# Altium PCB XCKU5P.PcbDoc (part 2 of 4)
Units mil, origin at the board's own origin, x right, y up, seen from the top; angles counter-clockwise.
Board outline 2716.54 x 2559.06 mil, 5 copper layers (Top Layer, SIG1, SIG2, SIG3, Bottom Layer); 206 components, 306 nets, 1544 pads, 186 vias.
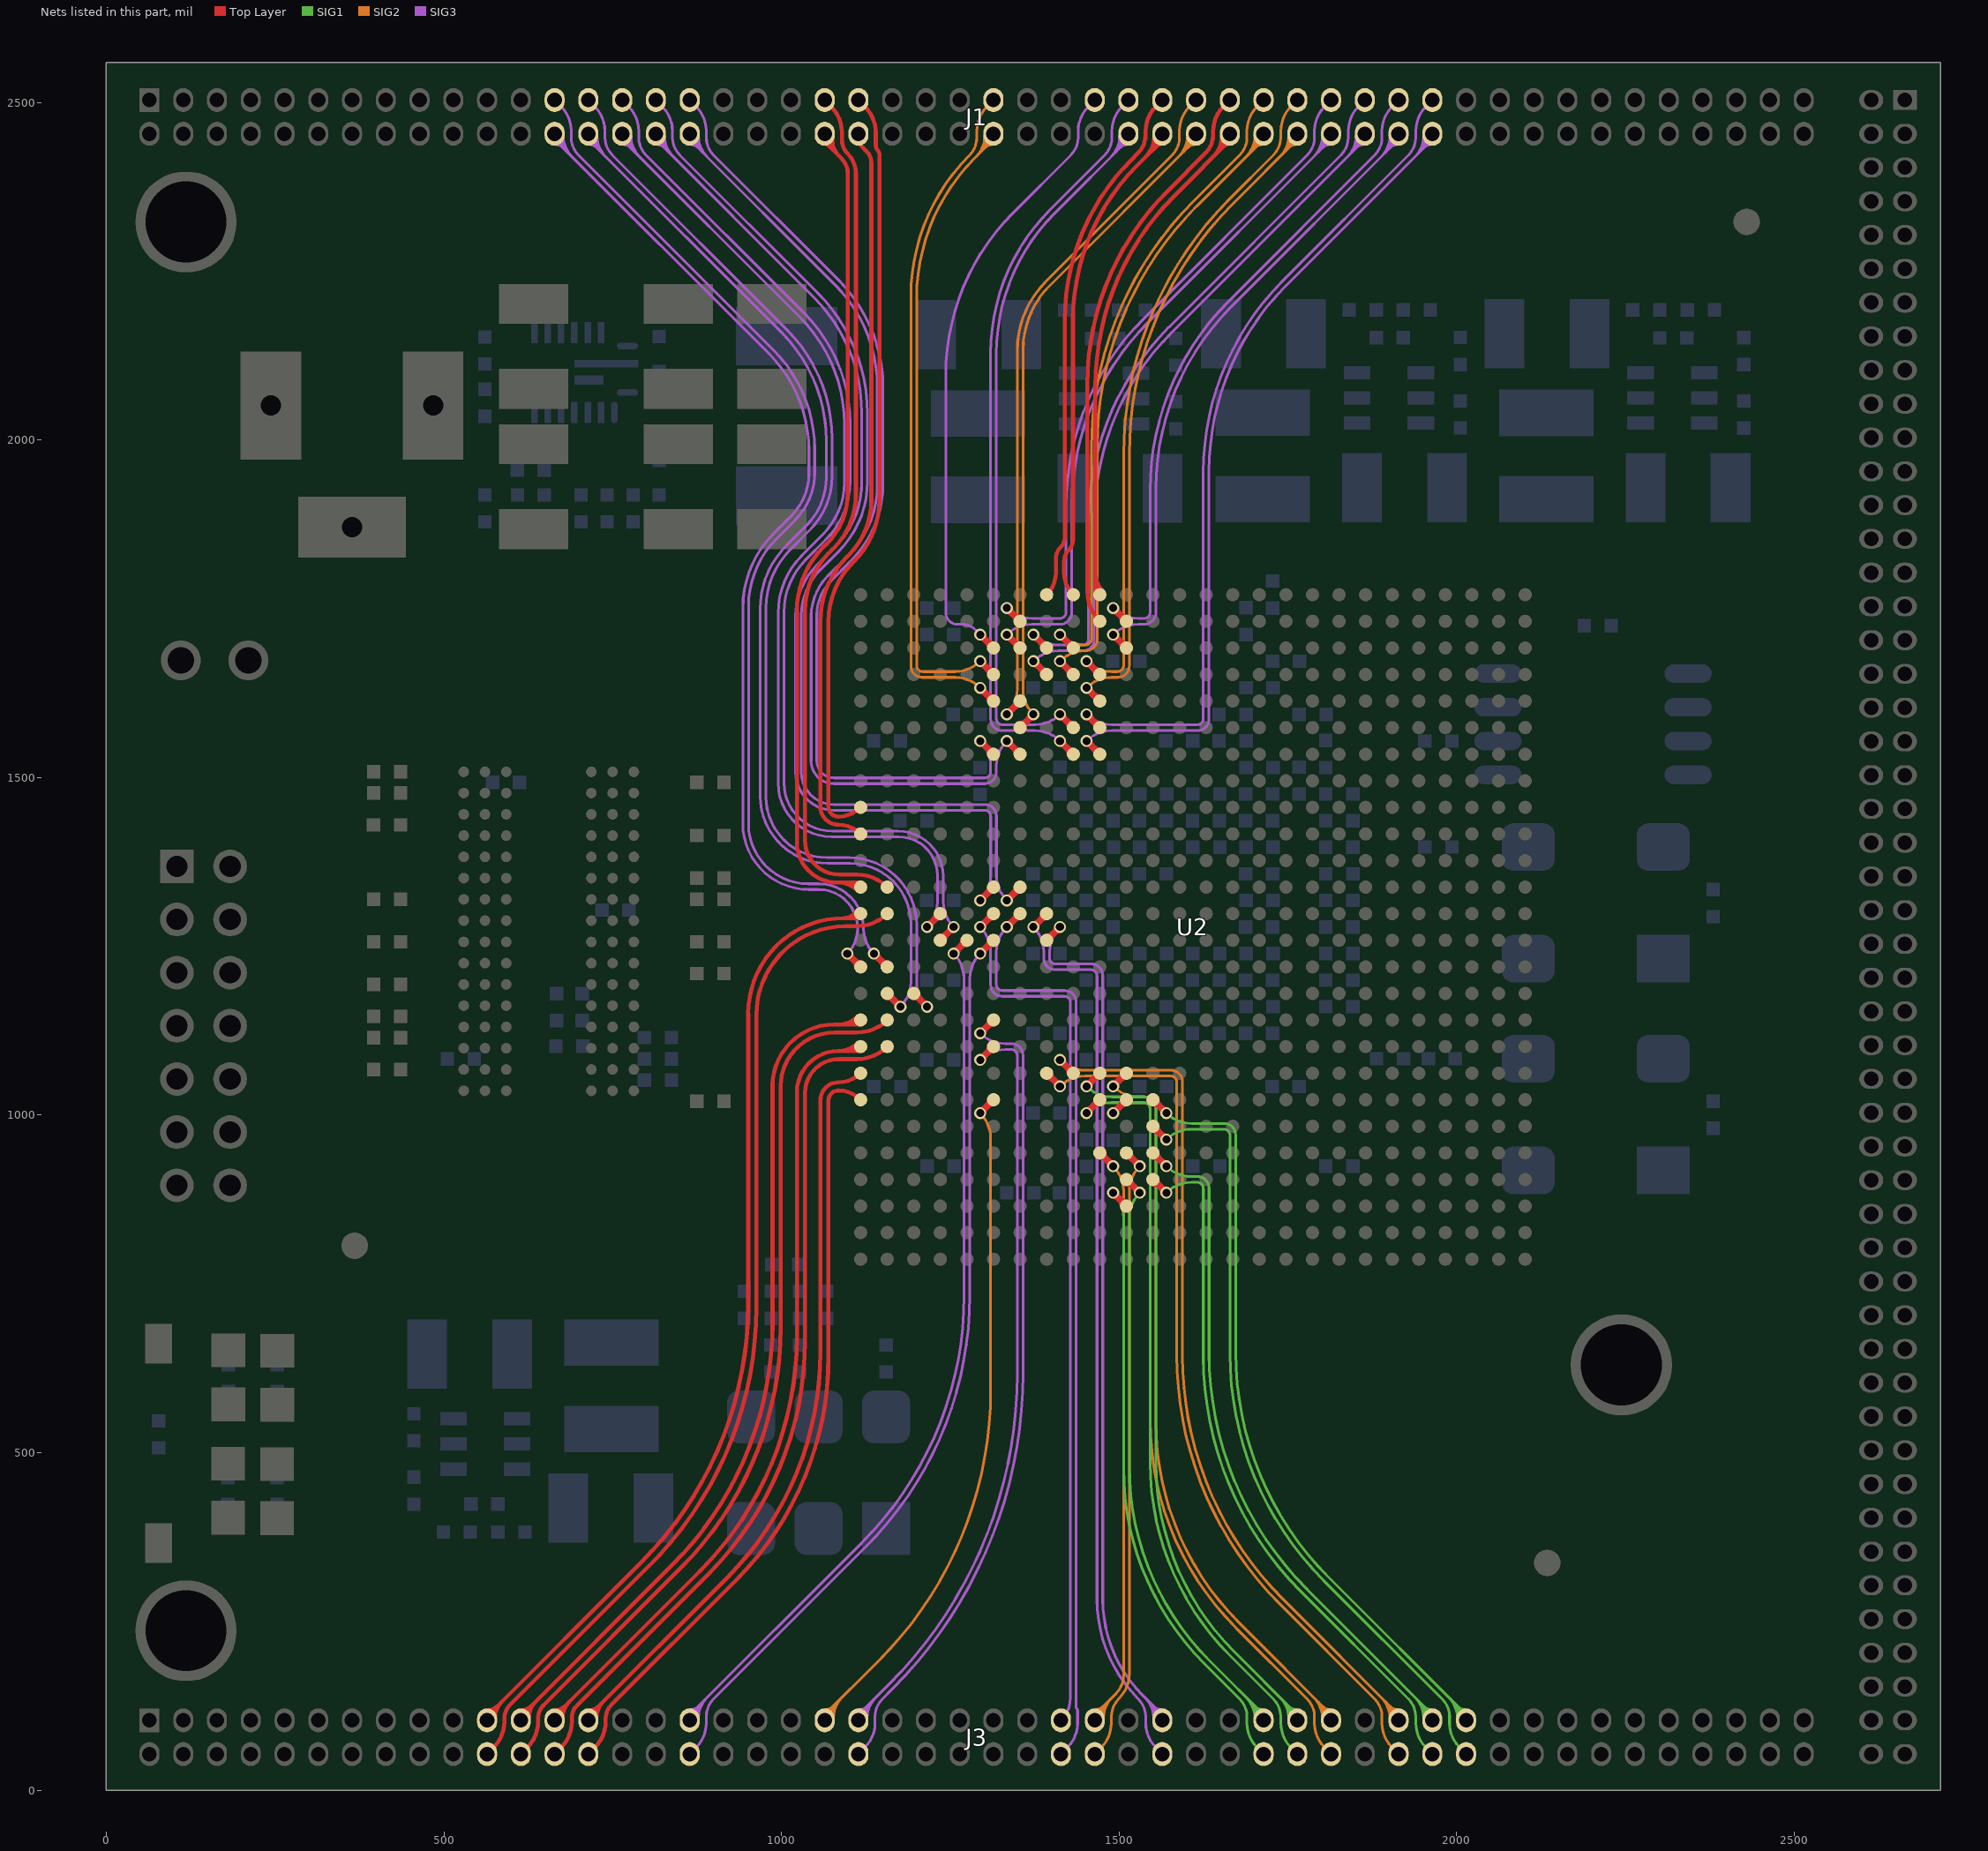
[diagram p5: the nets of this part, all layers, seen from the top]

## Via types
v1: diameter 17.72, hole 11.81, Top Layer to Bottom Layer, tented both sides, 186 vias

## Nets (pads, with @x,y where several pads share a name; then routed paths per layer and width w, separated by ;. In a path a pad name is that pad's centre, name@x,y a point inside that pad or via, vN(x,y) a via of type N, cw(c..) or ccw(c..) an arc to the next point about the centre after c; other vN are vias at no path point) (continued)
64_L11_P: J1.57 U2.AD21 | length 959.2
  Top Layer w10: v1@1294.39,1707.85 cw(c1294.39,1698.53) 1300.98,1705.12 cw(c1307.57,1711.71) v1@1298.25,1711.71 ; v1(1294.39,1711.71) U2.AD21@1314.08,1692.02 ; U2.AD21@1309.24,1692.02 ccw(c1297.55,1692.02) 1305.81,1700.29 ccw(c1314.08,1708.55) U2.AD21@1314.08,1696.86
  SIG3 w4: v1(1294.39,1711.71) 1287.5,1718.6 ccw(c1266.88,1697.98) 1266.88,1727.14 1260.16,1727.14 cw(c1260.16,1744.02) 1243.28,1744.02 1243.28,2096.05 cw(c1582.51,2096.05) 1342.64,2335.92 1428.43,2421.7 ccw(c1401.84,2448.29) 1439.44,2448.29 1439.44,2457.24 cw(c1491.77,2457.24) 1454.77,2494.25 J1.57@1464.02,2503.5
64_L12_N: J1.52 U2.AC21 | length 1072.4
  Top Layer w10: v1@1294.39,1668.48 cw(c1294.39,1659.16) 1300.98,1665.75 cw(c1307.57,1672.34) v1@1298.25,1672.34 ; v1(1294.39,1672.34) U2.AC21@1314.08,1652.65 ; U2.AC21@1309.24,1652.65 ccw(c1297.55,1652.65) 1305.81,1660.92 ccw(c1314.08,1669.18) U2.AC21@1314.08,1657.49
  SIG2 w4: 1288.77,2420.03 ccw(c1258.62,2450.17) J1.52@1301.26,2450.46 ; v1(1294.39,1672.34) cw(c1257.13,1709.6) 1257.13,1656.9 1209.22,1656.9 cw(c1209.22,1665.95) 1200.17,1665.95 1200.17,2209.86 cw(c1493.65,2209.86) 1286.13,2417.39 J1.52@1314.82,2446.08 ; 1295.53,2426.79 ccw(c1272.06,2450.26) J1.52@1305.26,2450.49 ; 1301.23,2432.49 cw(c1314.02,2419.7) J1.52@1314.02,2437.78 ; 1302.3,2433.55 ccw(c1285.49,2450.36) J1.52@1309.26,2450.52
64_L12_P: J1.51 U2.AB21 | length 1049.6
  Top Layer w10: v1@1294.39,1629.11 cw(c1294.39,1619.79) 1300.98,1626.38 cw(c1307.57,1632.97) v1@1298.25,1632.97 ; v1(1294.39,1632.97) U2.AB21@1314.08,1613.28 ; U2.AB21@1309.24,1613.28 ccw(c1297.55,1613.28) 1305.81,1621.55 ccw(c1314.08,1629.81) U2.AB21@1314.08,1618.12
  SIG2 w4: v1(1294.39,1632.97) ccw(c1257.13,1595.7) 1257.13,1648.4 1208.55,1648.4 cw(c1208.55,1665.28) 1191.67,1665.28 1191.67,2212.26 cw(c1487.86,2212.26) 1278.43,2421.7 ccw(c1251.84,2448.29) 1289.44,2448.29 1289.44,2457.24 cw(c1341.77,2457.24) 1304.77,2494.25 J1.51@1314.02,2503.5
64_L13_N: J1.71 U2.AE20 | length 1058.4
  Top Layer w10: v1@1333.76,1747.22 cw(c1333.76,1737.9) 1340.35,1744.49 cw(c1346.94,1751.08) v1@1337.62,1751.08 ; v1(1333.76,1751.08) U2.AE20@1353.45,1731.39 ; U2.AE20@1348.61,1731.39 ccw(c1336.92,1731.39) 1345.18,1739.66 ccw(c1353.45,1747.92) U2.AE20@1353.45,1736.23
  SIG3 w4: v1(1333.76,1751.08) ccw(c1371.03,1788.34) 1371.03,1735.64 1412.43,1735.64 ccw(c1412.43,1744.69) 1421.48,1744.69 1421.48,1901.24 cw(c1816.25,1901.24) 1537.11,2180.38 1778.43,2421.7 ccw(c1751.84,2448.29) 1789.44,2448.29 1789.44,2457.24 cw(c1841.77,2457.24) 1804.77,2494.25 J1.71@1814.02,2503.5
64_L13_P: J1.72 U2.AD20 | length 1108.6
  Top Layer w10: v1@1333.76,1707.85 cw(c1333.76,1698.53) 1340.35,1705.12 cw(c1346.94,1711.71) v1@1337.62,1711.71 ; v1(1333.76,1711.71) U2.AD20@1353.45,1692.02 ; U2.AD20@1348.61,1692.02 ccw(c1336.92,1692.02) 1345.18,1700.29 ccw(c1353.45,1708.55) U2.AD20@1353.45,1696.86
  SIG3 w4: v1(1333.76,1711.71) cw(c1371.03,1674.44) 1371.03,1727.14 1413.1,1727.14 ccw(c1413.1,1744.02) 1429.98,1744.02 1429.98,1902.04 cw(c1814.32,1902.04) 1542.55,2173.81 J1.72@1814.02,2445.28 ; 1788.5,2419.76 ccw(c1757.72,2450.55) J1.72@1801.26,2450.55 ; 1795.33,2426.59 ccw(c1771.37,2450.55) J1.72@1805.26,2450.55 ; 1801.23,2432.49 cw(c1814.02,2419.7) J1.72@1814.02,2437.78 ; 1802.16,2433.42 ccw(c1785.03,2450.55) J1.72@1809.26,2450.55
64_L14_N: J1.73 U2.AD19 | length 1098.1
  Top Layer w10: v1@1373.13,1707.85 cw(c1373.13,1698.53) 1379.72,1705.12 cw(c1386.31,1711.71) v1@1376.99,1711.71 ; v1(1373.13,1711.71) U2.AD19@1392.82,1692.02 ; U2.AD19@1387.98,1692.02 ccw(c1376.29,1692.02) 1384.55,1700.29 ccw(c1392.82,1708.55) U2.AD19@1392.82,1696.86
  SIG3 w4: v1(1373.13,1711.71) ccw(c1410.4,1748.97) 1410.4,1696.27 1445.83,1696.27 ; 1445.83,1696.27 ccw(c1445.83,1705.32) 1454.88,1705.32 1454.88,1879.55 cw(c1861.94,1879.55) 1574.11,2167.38 1828.43,2421.7 ccw(c1801.84,2448.29) 1839.44,2448.29 1839.44,2457.24 cw(c1891.77,2457.24) 1854.77,2494.25 J1.73@1864.02,2503.5
64_L14_P: J1.74 U2.AC19 | length 1148.5
  Top Layer w10: v1@1373.13,1668.48 cw(c1373.13,1659.16) 1379.72,1665.75 cw(c1386.31,1672.34) v1@1376.99,1672.34 ; v1(1373.13,1672.34) U2.AC19@1392.82,1652.65 ; U2.AC19@1387.98,1652.65 ccw(c1376.29,1652.65) 1384.55,1660.92 ccw(c1392.82,1669.18) U2.AC19@1392.82,1657.49
  SIG3 w4: v1(1373.13,1672.34) cw(c1410.4,1635.07) 1410.4,1687.77 1446.5,1687.77 ccw(c1446.5,1704.65) 1463.38,1704.65 1463.38,1881.33 cw(c1857.65,1881.33) 1578.86,2160.12 J1.74@1864.02,2445.28 ; 1838.5,2419.76 ccw(c1807.72,2450.55) J1.74@1851.26,2450.55 ; 1845.33,2426.59 ccw(c1821.37,2450.55) J1.74@1855.26,2450.55 ; 1851.23,2432.49 cw(c1864.02,2419.7) J1.74@1864.02,2437.78 ; 1852.16,2433.42 ccw(c1835.03,2450.55) J1.74@1859.26,2450.55
64_L15_N: J1.61 U2.AF19 | length 781.4
  Top Layer w6: U2.AF19@1392.82,1770.76 ccw(c1359.78,1803.8) 1406.5,1803.8 1406.5,1824.76 cw(c1429.08,1824.76) 1413.12,1840.73 ccw(c1397.15,1856.69) 1419.73,1856.69 1419.73,2177.46 cw(c1755.64,2177.46) 1518.12,2414.99 1528.33,2425.2 ccw(c1501.74,2451.79) 1539.34,2451.79 1539.34,2457 cw(c1592.01,2457) 1554.77,2494.25 J1.61@1564.02,2503.5
64_L15_P: J1.62 U2.AF18 | length 795.5
  Top Layer w6: U2.AF18@1432.19,1770.76 cw(c1465.23,1803.8) 1418.5,1803.8 1418.5,1820.26 cw(c1441.08,1820.26) 1425.12,1836.23 ccw(c1409.15,1852.19) 1431.73,1852.19 1431.73,2177.43 cw(c1755.89,2177.43) 1526.67,2406.65 J1.62@1568.41,2448.39 ; 1539.3,2419.28 ccw(c1508.03,2450.55) J1.62@1552.26,2450.55 ; 1549.55,2429.52 ccw(c1528.52,2450.55) J1.62@1558.26,2450.55 ; 1555.12,2435.1 cw(c1564.02,2426.2) J1.62@1564.02,2438.78
64_L16_N: J1.67 U2.AD18 | length 994
  Top Layer w10: v1@1412.5,1707.85 cw(c1412.5,1698.53) 1419.09,1705.12 cw(c1425.68,1711.71) v1@1416.36,1711.71 ; v1(1412.5,1711.71) U2.AD18@1432.19,1692.02 ; U2.AD18@1427.35,1692.02 ccw(c1415.66,1692.02) 1423.92,1700.29 ccw(c1432.19,1708.55) U2.AD18@1432.19,1696.86
  SIG2 w4: v1(1412.5,1711.71) ccw(c1449.77,1748.97) 1449.77,1696.27 ; 1450.13,1696.27 ccw(c1450.13,1705.32) 1459.18,1705.32 1459.18,1987.98 cw(c1976.99,1987.98) 1610.85,2354.12 1678.43,2421.7 ccw(c1651.84,2448.29) 1689.44,2448.29 1689.44,2457.24 cw(c1741.77,2457.24) 1704.77,2494.25 J1.67@1714.02,2503.5
64_L16_P: J1.68 U2.AC18 | length 1045.9
  Top Layer w10: v1@1412.5,1668.48 cw(c1412.5,1659.16) 1419.09,1665.75 cw(c1425.68,1672.34) v1@1416.36,1672.34 ; v1(1412.5,1672.34) U2.AC18@1432.19,1652.65 ; U2.AC18@1427.35,1652.65 ccw(c1415.66,1652.65) 1423.92,1660.92 ccw(c1432.19,1669.18) U2.AC18@1432.19,1657.49
  SIG2 w4: v1(1412.5,1672.34) cw(c1449.77,1635.07) 1449.77,1687.77 1450.8,1687.77 ccw(c1450.8,1704.65) 1467.68,1704.65 1467.68,1990.37 cw(c1971.2,1990.37) 1615.16,2346.42 J1.68@1714.82,2446.08 ; 1688.5,2419.76 ccw(c1657.72,2450.55) J1.68@1701.26,2450.55 ; 1695.33,2426.59 ccw(c1671.37,2450.55) J1.68@1705.26,2450.55 ; 1701.23,2432.49 cw(c1714.02,2419.7) J1.68@1714.02,2437.78 ; 1702.16,2433.42 ccw(c1685.03,2450.55) J1.68@1709.26,2450.55
64_L17_N: J1.66 U2.AF17 | length 864.6
  Top Layer w6: U2.AF17@1464.95,1769.37 1464.95,2079.2 cw(c1865.05,2079.2) 1582.13,2362.11 J1.66@1668.77,2448.75 ; 1464.95,1788.75 ccw(c1489.55,1788.75) U2.AF17@1472.15,1771.36 ; 1464.95,1803.24 ccw(c1504.04,1803.24) U2.AF17@1476.4,1775.6 ; 1639.3,2419.28 ccw(c1608.03,2450.55) J1.66@1652.26,2450.55 ; 1649.55,2429.52 ccw(c1628.52,2450.55) J1.66@1658.26,2450.55 ; 1655.12,2435.1 cw(c1664.02,2426.2) J1.66@1664.02,2438.78
64_L17_P: J1.65 U2.AE17 | length 843.2
  Top Layer w6: U2.AE17@1471.56,1731.39 cw(c1516.49,1776.32) 1452.95,1776.32 1452.95,2081.85 cw(c1858.47,2081.85) 1571.72,2368.6 1628.33,2425.2 ccw(c1601.74,2451.79) 1639.34,2451.79 1639.34,2457 cw(c1692.01,2457) 1654.77,2494.25 J1.65@1664.02,2503.5
64_L18_N: J1.75 U2.AE16 | length 1015.3
  Top Layer w10: v1@1491.24,1747.22 cw(c1491.24,1737.9) 1497.83,1744.49 cw(c1504.42,1751.08) v1@1495.1,1751.08 ; v1(1491.24,1751.08) U2.AE16@1510.93,1731.39 ; U2.AE16@1506.09,1731.39 ccw(c1494.4,1731.39) 1502.66,1739.66 ccw(c1510.93,1747.92) U2.AE16@1510.93,1736.23
  SIG3 w4: v1(1491.24,1751.08) ccw(c1528.51,1788.34) 1528.51,1735.64 1537,1735.64 ccw(c1537,1744.69) 1546.05,1744.69 1546.05,1925.5 cw(c1941.56,1925.5) 1661.89,2205.17 1878.43,2421.7 ccw(c1851.84,2448.29) 1889.44,2448.29 1889.44,2457.24 cw(c1941.77,2457.24) 1904.77,2494.25 J1.75@1914.02,2503.5
64_L18_P: J1.76 U2.AD16 | length 1065.7
  Top Layer w10: v1@1491.24,1707.85 cw(c1491.24,1698.53) 1497.83,1705.12 cw(c1504.42,1711.71) v1@1495.1,1711.71 ; v1(1491.24,1711.71) U2.AD16@1510.93,1692.02 ; U2.AD16@1506.09,1692.02 ccw(c1494.4,1692.02) 1502.66,1700.29 ccw(c1510.93,1708.55) U2.AD16@1510.93,1696.86
  SIG3 w4: v1(1491.24,1711.71) cw(c1528.51,1674.44) 1528.51,1727.14 1537.67,1727.14 ccw(c1537.67,1744.02) 1554.55,1744.02 1554.55,1927.97 cw(c1935.59,1927.97) 1666.15,2197.41 J1.76@1914.02,2445.28 ; 1888.5,2419.76 ccw(c1857.72,2450.55) J1.76@1901.26,2450.55 ; 1895.33,2426.59 ccw(c1871.37,2450.55) J1.76@1905.26,2450.55 ; 1901.23,2432.49 cw(c1914.02,2419.7) J1.76@1914.02,2437.78 ; 1902.16,2433.42 ccw(c1885.03,2450.55) J1.76@1909.26,2450.55
64_L19_N: J1.33 U2.Y21 | length 1502
  Top Layer w10: v1@1294.39,1550.37 cw(c1294.39,1541.05) 1300.98,1547.64 cw(c1307.57,1554.23) v1@1298.25,1554.23 ; v1(1294.39,1554.23) U2.Y21@1314.08,1534.54 ; U2.Y21@1309.24,1534.54 ccw(c1297.55,1534.54) 1305.81,1542.81 ccw(c1314.08,1551.07) U2.Y21@1314.08,1539.38
  SIG3 w4: J1.33@864.02,2503.5 873.27,2494.25 cw(c836.27,2457.24) 888.6,2457.24 888.6,2448.29 ccw(c926.2,2448.29) 899.61,2421.7 1084.34,2236.98 cw(c924.82,2077.46) 1150.41,2077.46 1150.41,1935.57 cw(c987.91,1935.57) 1102.82,1820.67 1073.31,1791.17 ccw(c1123.78,1740.7) 1052.41,1740.7 1052.41,1525.05 ccw(c1078.08,1525.05) 1078.08,1499.37 1300.78,1499.37 ccw(c1300.78,1508.43) 1309.83,1508.43 1309.83,1516.96 ccw(c1257.13,1516.96) v1(1294.39,1554.23)
64_L19_P: J1.34 U2.Y20 | length 1566
  Top Layer w10: v1@1333.76,1550.37 cw(c1333.76,1541.05) 1340.35,1547.64 cw(c1346.94,1554.23) v1@1337.62,1554.23 ; v1(1333.76,1554.23) U2.Y20@1353.45,1534.54 ; U2.Y20@1348.61,1534.54 ccw(c1336.92,1534.54) 1345.18,1542.81 ccw(c1353.45,1551.07) U2.Y20@1353.45,1539.38
  SIG3 w4: J1.34@864.02,2437.78 cw(c864.02,2419.7) 876.81,2432.49 ; J1.34@864.02,2445.28 1079.41,2229.88 cw(c928.53,2079) 1141.91,2079 1141.91,1933.11 cw(c993.85,1933.11) 1098.55,1828.42 1068.96,1798.83 ccw(c1129.44,1738.36) 1043.91,1738.36 1043.91,1524.5 ccw(c1077.54,1524.5) 1077.54,1490.88 1301.45,1490.88 ccw(c1301.45,1507.76) 1318.33,1507.76 1318.33,1516.96 cw(c1371.03,1516.96) v1(1333.76,1554.23) ; J1.34@868.78,2450.55 ccw(c893.01,2450.55) 875.88,2433.42 ; J1.34@872.78,2450.55 ccw(c906.67,2450.55) 882.71,2426.59 ; J1.34@876.78,2450.55 ccw(c920.32,2450.55) 889.54,2419.76
64_L21_N: J1.63 U2.AB20 | length 1074.4
  Top Layer w10: v1(1333.76,1593.59) U2.AB20@1353.45,1613.28 ; v1@1333.76,1597.45 ccw(c1333.76,1606.77) 1340.35,1600.18 ccw(c1346.94,1593.59) v1@1337.62,1593.59 ; U2.AB20@1348.61,1613.28 cw(c1336.92,1613.28) 1345.18,1605.01 cw(c1353.45,1596.75) U2.AB20@1353.45,1608.44
  SIG2 w4: v1(1333.76,1593.59) ccw(c1296.5,1630.86) 1349.2,1630.86 1349.2,2131.78 cw(c1495.73,2131.78) 1392.12,2235.39 1578.43,2421.7 ccw(c1551.84,2448.29) 1589.44,2448.29 1589.44,2457.24 cw(c1641.77,2457.24) 1604.77,2494.25 J1.63@1614.02,2503.5
64_L21_P: J1.64 U2.AA20 | length 1112.2
  Top Layer w10: U2.AA20@1353.45,1573.91 v1(1373.13,1593.6) ; U2.AA20@1353.45,1578.75 ccw(c1353.45,1590.44) 1361.72,1582.18 ccw(c1369.98,1573.91) U2.AA20@1358.29,1573.91 ; v1@1369.28,1593.6 cw(c1359.96,1593.6) 1366.55,1587.01 cw(c1373.13,1580.42) v1@1373.13,1589.74
  SIG2 w4: v1@1373.13,1593.59 cw(c1410.4,1630.86) 1357.7,1630.86 1357.7,2133.3 cw(c1492.07,2133.3) 1397.05,2228.31 J1.64@1614.82,2446.08 ; 1588.5,2419.76 ccw(c1557.72,2450.55) J1.64@1601.26,2450.55 ; 1595.33,2426.59 ccw(c1571.37,2450.55) J1.64@1605.26,2450.55 ; 1601.23,2432.49 cw(c1614.02,2419.7) J1.64@1614.02,2437.78 ; 1602.16,2433.42 ccw(c1585.03,2450.55) J1.64@1609.26,2450.55
64_L22_N: J1.69 U2.AC17 | length 1042.2
  Top Layer w10: v1@1451.87,1668.48 cw(c1451.87,1659.16) 1458.46,1665.75 cw(c1465.05,1672.34) v1@1455.73,1672.34 ; v1(1451.87,1672.34) U2.AC17@1471.56,1652.65 ; U2.AC17@1466.72,1652.65 ccw(c1455.03,1652.65) 1463.29,1660.92 ccw(c1471.56,1669.18) U2.AC17@1471.56,1657.49
  SIG2 w4: v1(1451.87,1672.34) ccw(c1489.14,1709.6) 1489.14,1656.9 1497.67,1656.9 ccw(c1497.67,1665.95) 1506.72,1665.95 1506.72,1978.39 cw(c2041.73,1978.39) 1663.42,2356.7 1728.43,2421.7 ccw(c1701.84,2448.29) 1739.44,2448.29 1739.44,2457.24 cw(c1791.77,2457.24) 1754.77,2494.25 J1.69@1764.02,2503.5
64_L22_P: J1.70 U2.AB17 | length 1093.6
  Top Layer w10: v1@1451.87,1629.11 cw(c1451.87,1619.79) 1458.46,1626.38 cw(c1465.05,1632.97) v1@1455.73,1632.97 ; v1(1451.87,1632.97) U2.AB17@1471.56,1613.28 ; U2.AB17@1466.72,1613.28 ccw(c1455.03,1613.28) 1463.29,1621.55 ccw(c1471.56,1629.81) U2.AB17@1471.56,1618.12
  SIG2 w4: v1(1451.87,1632.97) cw(c1489.14,1595.7) 1489.14,1648.4 1498.34,1648.4 ccw(c1498.34,1665.28) 1515.22,1665.28 1515.22,1979.45 cw(c2039.18,1979.45) 1668.69,2349.94 J1.70@1764.82,2446.08 ; 1738.5,2419.76 ccw(c1707.72,2450.55) J1.70@1751.26,2450.55 ; 1745.33,2426.59 ccw(c1721.37,2450.55) J1.70@1755.26,2450.55 ; 1751.23,2432.49 cw(c1764.02,2419.7) J1.70@1764.02,2437.78 ; 1752.16,2433.42 ccw(c1735.03,2450.55) J1.70@1759.26,2450.55
64_L23_N: J1.77 U2.AA17 | length 1278.7
  Top Layer w10: v1@1451.87,1589.74 cw(c1451.87,1580.42) 1458.46,1587.01 cw(c1465.05,1593.6) v1@1455.73,1593.6 ; v1(1451.87,1593.6) U2.AA17@1471.56,1573.91 ; U2.AA17@1466.72,1573.91 ccw(c1455.03,1573.91) 1463.29,1582.18 ccw(c1471.56,1590.44) U2.AA17@1471.56,1578.75
  SIG3 w4: v1(1451.87,1593.6) ccw(c1489.14,1630.86) 1489.14,1578.16 1615.74,1578.16 ; 1615.74,1578.12 ccw(c1615.74,1587.17) 1624.79,1587.17 1624.79,1951.62 cw(c2026.61,1951.62) 1742.48,2235.75 1928.43,2421.7 ccw(c1901.84,2448.29) 1939.44,2448.29 1939.44,2457.24 cw(c1991.77,2457.24) 1954.77,2494.25 J1.77@1964.02,2503.5
64_L23_P: J1.78 U2.Y17 | length 1329.1
  Top Layer w10: v1@1451.87,1550.37 cw(c1451.87,1541.05) 1458.46,1547.64 cw(c1465.05,1554.23) v1@1455.73,1554.23 ; v1(1451.87,1554.23) U2.Y17@1471.56,1534.54 ; U2.Y17@1466.72,1534.54 ccw(c1455.03,1534.54) 1463.29,1542.81 ccw(c1471.56,1551.07) U2.Y17@1471.56,1539.38
  SIG3 w4: v1(1451.87,1554.23) cw(c1489.14,1516.96) 1489.14,1569.66 1616.41,1569.66 ; 1616.41,1569.62 ccw(c1616.41,1586.5) 1633.29,1586.5 1633.29,1953.69 cw(c2021.62,1953.69) 1747.03,2228.29 J1.78@1964.02,2445.28 ; 1938.5,2419.76 ccw(c1907.72,2450.55) J1.78@1951.26,2450.55 ; 1945.33,2426.59 ccw(c1921.37,2450.55) J1.78@1955.26,2450.55 ; 1951.23,2432.49 cw(c1964.02,2419.7) J1.78@1964.02,2437.78 ; 1952.16,2433.42 ccw(c1935.03,2450.55) J1.78@1959.26,2450.55
64_L24_N: J1.60 U2.AA18 | length 1184.9
  Top Layer w10: v1@1412.5,1589.74 cw(c1412.5,1580.42) 1419.09,1587.01 cw(c1425.68,1593.6) v1@1416.36,1593.6 ; v1(1412.5,1593.6) U2.AA18@1432.19,1573.91 ; U2.AA18@1427.35,1573.91 ccw(c1415.66,1573.91) 1423.92,1582.18 ccw(c1432.19,1590.44) U2.AA18@1432.19,1578.75
  SIG3 w4: v1(1412.5,1593.6) cw(c1375.24,1630.86) 1375.24,1578.16 1327.33,1578.16 cw(c1327.33,1587.21) 1318.28,1587.21 1318.28,2127.65 cw(c1612.55,2127.65) 1404.47,2335.73 J1.60@1514.02,2445.28 ; 1488.5,2419.76 ccw(c1457.72,2450.55) J1.60@1501.26,2450.55 ; 1495.33,2426.59 ccw(c1471.37,2450.55) J1.60@1505.26,2450.55 ; 1501.23,2432.49 cw(c1514.02,2419.7) J1.60@1514.02,2437.78 ; 1502.16,2433.42 ccw(c1485.03,2450.55) J1.60@1509.26,2450.55
64_L24_P: J1.59 U2.Y18 | length 1162
  Top Layer w10: v1@1412.5,1550.37 cw(c1412.5,1541.05) 1419.09,1547.64 cw(c1425.68,1554.23) v1@1416.36,1554.23 ; v1(1412.5,1554.23) U2.Y18@1432.19,1534.54 ; U2.Y18@1427.35,1534.54 ccw(c1415.66,1534.54) 1423.92,1542.81 ccw(c1432.19,1551.07) U2.Y18@1432.19,1539.38
  SIG3 w4: v1(1412.5,1554.23) ccw(c1375.24,1516.96) 1375.24,1569.66 1326.66,1569.66 cw(c1326.66,1586.54) 1309.78,1586.54 1309.78,2128.32 cw(c1610.92,2128.32) 1397.99,2341.26 1478.43,2421.7 ccw(c1451.84,2448.29) 1489.44,2448.29 1489.44,2457.24 cw(c1541.77,2457.24) 1504.77,2494.25 J1.59@1514.02,2503.5
65_L16_N: J1.43 U2.V26 | length 1136.4
  Top Layer w6: J1.43@1114.02,2503.5 1123.27,2494.25 cw(c1083.61,2454.59) 1139.7,2454.59 1139.7,2435.85 ccw(c1149.07,2435.85) 1142.45,2429.23 cw(c1135.83,2422.61) 1145.19,2422.61 1145.19,2418.4 1145.19,1911.39 cw(c1016.26,1911.39) 1107.43,1820.22 1106.03,1818.82 ccw(c1193.78,1731.07) 1069.68,1731.07 1069.68,1456.62 ccw(c1084.19,1456.62) 1084.19,1442.11 ccw(c1084.19,1488.84) U2.V26@1117.23,1455.8
65_L16_P: J1.44 U2.U26 | length 1098.1
  Top Layer w6: 1097.01,1826.77 ccw(c1192.17,1731.74) 1057.68,1731.74 1057.68,1456.62 ccw(c1084.19,1456.62) 1084.19,1430.11 cw(c1084.19,1383.39) U2.U26@1117.23,1416.43 ; 1097.07,1826.84 1098.74,1828.5 ccw(c1015.56,1911.67) 1133.19,1911.67 1133.19,2410.17 ccw(c1107.99,2410.17) 1125.81,2427.99 1121.89,2431.9 ; J1.44@1108.2,2445.6 1122.72,2431.08
65_L17_N: J3.21 U2.P26 | length 1526.2
  Top Layer w6: J3.21@564.02,109.28 792.34,337.6 ccw(c409.84,720.1) 950.78,720.1 950.78,1150.48 cw(c1092,1150.48) 1092,1291.71 ; J3.21@564.02,118.22 ccw(c564.02,139.8) 579.28,124.54 ; J3.21@569.78,106.45 cw(c590.52,106.45) 575.86,121.11 ; J3.21@575.78,106.45 cw(c611,106.45) 586.1,131.36 ; 1103.25,1291.71 ccw(c1103.25,1307.69) U2.P26@1116.53,1298.79 ; U2.P26@1111.55,1302.13 cw(c1092.01,1315.23) 1092.01,1291.71 ; U2.P26@1118.62,1291.71 1092,1291.71
65_L17_P: J3.22 U2.P25 | length 1506.8
  Top Layer w6: J3.22@564.02,53.5 573.27,62.75 ccw(c533.61,102.41) 589.7,102.41 589.7,106.45 cw(c617.55,106.45) 597.85,126.13 804.48,332.77 ccw(c422.32,714.93) 962.78,714.93 962.78,1148.03 cw(c1094.46,1148.03) 1094.46,1279.71 1111.67,1279.71 ccw(c1111.67,1343.25) U2.P25@1156.6,1298.32
65_L18_N: J1.42 U2.R26 | length 1316.6
  Top Layer w6: J1.42@1058.5,2447.5 1088.68,2417.32 ; J1.42@1064.02,2438.78 cw(c1064.02,2431.07) 1069.48,2436.52 ; J1.42@1069.71,2449.63 ccw(c1092.2,2446.01) 1076.09,2429.91 ; J1.42@1075.63,2448.68 ccw(c1106.5,2443.71) 1084.4,2421.6 ; 1084.75,1344.3 cw(c1084.75,1305.21) U2.R26@1112.39,1332.85 ; 1088.7,2417.3 cw(c1065.5,2394.14) 1098.28,2394.14 1098.28,1921.05 cw(c992.94,1921.05) 1067.43,1846.56 1061.82,1840.95 ccw(c1156.07,1746.69) 1022.78,1746.69 1022.78,1404.15 ccw(c1082.63,1404.15) 1082.63,1344.3 U2.R26@1118.62,1344.3 ; 1099.23,1344.3 cw(c1099.23,1319.69) U2.R26@1116.63,1337.09
65_L18_P: J1.41 U2.R25 | length 1287.1
  Top Layer w6: J1.41@1064.02,2503.5 1073.27,2494.25 cw(c1033.61,2454.59) 1089.7,2454.59 1089.7,2444.07 ccw(c1117.88,2444.07) 1097.95,2424.15 cw(c1068.19,2394.38) 1110.28,2394.38 1110.28,1919.76 cw(c996.06,1919.76) 1076.84,1839 ; 1076.83,1838.99 1070.35,1832.51 ccw(c1156.25,1746.62) 1034.78,1746.62 1034.78,1406.9 ccw(c1085.37,1406.9) 1085.37,1356.3 1111.67,1356.3 cw(c1111.67,1292.76) U2.R25@1156.6,1337.69
65_L20_N: J3.55 U2.P21 | length 1350.9
  Top Layer w10: v1(1294.39,1278.63) U2.P21@1314.08,1298.32 ; v1@1294.39,1282.49 ccw(c1294.39,1291.81) 1300.98,1285.22 ; v1@1298.25,1278.63 cw(c1307.56,1278.63) 1300.98,1285.22 ; U2.P21@1309.24,1298.32 cw(c1297.55,1298.32) 1305.81,1290.05 cw(c1314.08,1281.79) U2.P21@1314.08,1293.48
  SIG3 w4: v1(1294.39,1278.63) cw(c1257.13,1241.37) 1309.83,1241.37 1309.83,1192.84 ccw(c1326.71,1192.84) 1326.71,1175.96 1418.93,1175.96 cw(c1418.93,1166.91) 1427.98,1166.91 1427.98,137 cw(c1380.82,137) 1414.17,103.65 J3.55@1414.02,103.5
65_L20_P: J3.56 U2.P20 | length 1405.6
  Top Layer w10: v1(1333.76,1278.63) U2.P20@1353.45,1298.32 ; v1@1333.76,1282.49 ccw(c1333.76,1291.81) 1340.35,1285.22 ; v1@1337.62,1278.63 cw(c1346.93,1278.63) 1340.35,1285.22 ; U2.P20@1348.61,1298.32 cw(c1336.92,1298.32) 1345.18,1290.05 cw(c1353.45,1281.79) U2.P20@1353.45,1293.48
  SIG3 w4: v1(1333.76,1278.63) ccw(c1371.03,1241.37) 1318.33,1241.37 1318.33,1193.51 ccw(c1327.38,1193.51) 1327.38,1184.46 1419.6,1184.46 cw(c1419.6,1167.58) 1436.48,1167.58 1436.48,123 ccw(c1440.1,123) 1437.54,120.44 cw(c1434.98,117.89) 1438.6,117.89 1438.6,99.76 cw(c1386.27,99.76) 1423.27,62.75 J3.56@1414.02,53.5
65_L21_N: J1.32 U2.R21 | length 1699.1
  Top Layer w10: v1(1294.39,1318) U2.R21@1314.08,1337.69 ; v1@1294.39,1321.86 ccw(c1294.39,1331.18) 1300.98,1324.59 ccw(c1307.56,1318) v1@1298.25,1318 ; U2.R21@1309.24,1337.69 cw(c1297.55,1337.69) 1305.81,1329.42 cw(c1314.08,1321.16) U2.R21@1314.08,1332.85
  SIG3 w4: J1.32@809.91,2449.39 1048.17,2211.13 cw(c877.39,2040.34) 1118.91,2040.34 1118.91,1936.51 cw(c985.64,1936.51) 1079.88,1842.28 1052.93,1815.33 ccw(c1130.23,1738.03) 1020.91,1738.03 1020.91,1507.86 ccw(c1077.23,1507.86) 1077.23,1451.55 1300.82,1451.55 cw(c1300.82,1442.5) 1309.87,1442.5 1309.87,1355.27 cw(c1257.17,1355.27) v1(1294.39,1318) ; J1.32@814.02,2437.78 cw(c814.02,2419.7) 826.81,2432.49 ; J1.32@818.78,2450.55 ccw(c843.01,2450.55) 825.88,2433.42 ; J1.32@822.78,2450.55 ccw(c856.67,2450.55) 832.71,2426.59 ; J1.32@826.78,2450.55 ccw(c870.32,2450.55) 839.54,2419.76
65_L21_P: J1.31 U2.R20 | length 1656.8
  Top Layer w10: v1(1333.76,1318) U2.R20@1353.45,1337.69 ; v1@1333.76,1321.86 ccw(c1333.76,1331.18) 1340.35,1324.59 ccw(c1346.93,1318) v1@1337.62,1318 ; U2.R20@1348.61,1337.69 cw(c1336.92,1337.69) 1345.18,1329.42 cw(c1353.45,1321.16) U2.R20@1353.45,1332.85
  SIG3 w4: J1.31@814.02,2503.5 823.27,2494.25 cw(c786.27,2457.24) 838.6,2457.24 838.6,2448.29 ccw(c876.2,2448.29) 849.61,2421.7 1053.32,2217.99 cw(c874.45,2039.13) 1127.41,2039.13 1127.41,1938.76 cw(c980.23,1938.76) 1084.3,1834.68 1057.52,1807.9 ccw(c1125.37,1740.04) 1029.41,1740.04 1029.41,1507.94 ccw(c1077.3,1507.94) 1077.3,1460.05 1301.49,1460.05 cw(c1301.49,1443.17) 1318.37,1443.17 1318.37,1355.27 ccw(c1371.07,1355.27) v1(1333.76,1318)
65_L22_N: J1.30 U2.P23 | length 1666.3
  Top Layer w10: v1(1215.65,1278.63) U2.P23@1235.34,1298.32 ; v1@1215.65,1282.49 ccw(c1215.65,1291.81) 1222.24,1285.22 ccw(c1228.83,1278.63) v1@1219.51,1278.63 ; U2.P23@1230.5,1298.32 cw(c1218.81,1298.32) 1227.07,1290.05 cw(c1235.34,1281.79) U2.P23@1235.34,1293.48
  SIG3 w4: J1.30@759.91,2449.39 1027.97,2181.32 cw(c870.59,2023.94) 1093.17,2023.94 1093.17,1937.12 cw(c984.17,1937.12) 1061.24,1860.05 1030.67,1829.48 ccw(c1116.38,1743.76) 995.17,1743.76 995.17,1491.12 ccw(c1074.11,1491.12) 1074.11,1412.18 1173.61,1412.18 cw(c1173.61,1354.7) 1231.09,1354.7 1231.09,1315.9 cw(c1178.39,1315.9) v1(1215.65,1278.63) ; J1.30@764.02,2437.78 cw(c764.02,2419.7) 776.81,2432.49 ; J1.30@768.78,2450.55 ccw(c793.01,2450.55) 775.88,2433.42 ; J1.30@772.78,2450.55 ccw(c806.67,2450.55) 782.71,2426.59 ; J1.30@776.78,2450.55 ccw(c820.32,2450.55) 789.54,2419.76
65_L22_P: J1.29 U2.N23 | length 1623
  Top Layer w10: U2.N23@1235.34,1258.95 v1(1255.02,1278.63) ; U2.N23@1235.34,1263.79 ccw(c1235.34,1275.48) 1243.61,1267.22 ccw(c1251.87,1258.95) U2.N23@1240.18,1258.95 ; v1@1251.17,1278.63 cw(c1241.85,1278.63) 1248.44,1272.05 cw(c1255.02,1265.46) v1@1255.02,1274.78
  SIG3 w4: J1.29@764.02,2503.5 773.27,2494.25 cw(c736.27,2457.24) 788.6,2457.24 788.6,2448.29 ccw(c826.2,2448.29) 799.61,2421.7 1034.02,2187.3 cw(c870.71,2023.98) 1101.66,2023.98 1101.66,1939.26 cw(c979.01,1939.26) 1065.74,1852.53 1036.04,1822.83 ccw(c1114.19,1744.67) 1003.66,1744.67 1003.66,1491.9 ccw(c1074.89,1491.9) 1074.89,1420.68 1172.44,1420.68 cw(c1172.44,1353.53) 1239.59,1353.53 1239.59,1315.9 ccw(c1292.29,1315.9) v1(1255.02,1278.63)
65_L23_N: J3.62 U2.P19 | length 1384.8
  Top Layer w10: v1(1373.13,1278.63) U2.P19@1392.82,1298.32 ; v1@1373.13,1282.49 ccw(c1373.13,1291.81) 1379.72,1285.22 ; v1@1376.99,1278.63 cw(c1386.3,1278.63) 1379.72,1285.22 ; U2.P19@1387.98,1298.32 cw(c1376.29,1298.32) 1384.55,1290.05 cw(c1392.82,1281.79) U2.P19@1392.82,1293.48
  SIG3 w4: v1(1373.13,1278.63) cw(c1335.87,1241.37) 1388.57,1241.37 1388.57,1232.21 ; 1388.52,1232.21 ccw(c1405.4,1232.21) 1405.4,1215.33 1458.3,1215.33 cw(c1458.3,1206.28) 1467.36,1206.28 1467.36,282.74 ccw(c1675.87,282.74) 1528.27,135.45 ; 1528.43,135.3 cw(c1501.84,108.71) 1539.44,108.71 1539.44,99.76 ccw(c1591.77,99.76) 1554.77,62.75 J3.62@1564.02,53.5
65_L23_P: J3.61 U2.N19 | length 1426.6
  Top Layer w10: U2.N19@1392.82,1258.95 v1(1412.5,1278.63) ; U2.N19@1392.82,1263.79 ccw(c1392.82,1275.48) 1401.09,1267.22 ccw(c1409.35,1258.95) U2.N19@1397.66,1258.95 ; v1@1408.65,1278.63 cw(c1399.34,1278.63) 1405.92,1272.05 cw(c1412.5,1265.46) v1@1412.5,1274.77
  SIG3 w4: 1397.02,1232.88 ccw(c1406.07,1232.88) 1406.07,1223.83 1458.97,1223.83 cw(c1458.97,1206.95) 1475.85,1206.95 1475.85,282.66 ccw(c1676.15,282.66) 1534.52,141.03 J3.61@1568.03,107.51 ; 1397.07,1232.88 1397.07,1241.37 cw(c1449.77,1241.37) v1(1412.5,1278.63) ; 1538.64,136.9 cw(c1508.19,106.45) J3.61@1551.26,106.45 ; 1545.47,130.08 cw(c1521.85,106.45) J3.61@1555.26,106.45 ; 1550.89,124.65 ccw(c1564.02,137.78) J3.61@1564.02,119.22 ; 1552.3,123.25 cw(c1535.5,106.45) J3.61@1559.26,106.45
65_L24_N: J3.33 U2.N22 | length 1437.8
  Top Layer w10: v1(1255.02,1239.26) U2.N22@1274.71,1258.95 ; v1@1255.02,1243.12 ccw(c1255.02,1252.44) 1261.61,1245.85 ccw(c1268.19,1239.26) v1@1258.88,1239.26 ; U2.N22@1269.87,1258.95 cw(c1258.18,1258.95) 1266.44,1250.68 cw(c1274.71,1242.42) U2.N22@1274.71,1254.11
  SIG3 w4: J3.33@860.01,107.51 1119.03,366.54 ccw(c753.45,732.12) 1270.46,732.12 1270.46,1202 ccw(c1217.76,1202) v1(1255.02,1239.26) ; J3.33@864.02,119.22 ccw(c864.02,137.78) 877.15,124.65 ; J3.33@868.78,106.45 cw(c892.53,106.45) 875.74,123.25 ; J3.33@872.78,106.45 cw(c906.19,106.45) 882.57,130.08 ; J3.33@876.78,106.45 cw(c919.85,106.45) 889.4,136.9
65_L24_P: J3.34 U2.N21 | length 1396.1
  Top Layer w10: v1(1294.39,1239.26) U2.N21@1314.08,1258.95 ; v1@1294.39,1243.12 ccw(c1294.39,1252.44) 1300.98,1245.85 ccw(c1307.56,1239.26) v1@1298.25,1239.26 ; U2.N21@1309.24,1258.95 cw(c1297.55,1258.95) 1305.81,1250.68 cw(c1314.08,1242.42) U2.N21@1314.08,1254.11
  SIG3 w4: J3.34@864.02,53.5 873.27,62.75 ccw(c836.27,99.76) 888.6,99.76 888.6,108.71 cw(c926.2,108.71) 899.61,135.3 1125.01,360.69 ccw(c753.33,732.36) 1278.96,732.36 1278.96,1202 cw(c1331.66,1202) v1(1294.39,1239.26)
66_L5_N: J3.43 U2.J21 | length 1270
  Top Layer w10: v1(1294.39,1081.78) U2.J21@1314.08,1101.47 ; v1@1294.39,1085.64 ccw(c1294.39,1094.96) 1300.98,1088.37 ccw(c1307.57,1081.78) v1@1298.25,1081.78 ; U2.J21@1309.24,1101.47 cw(c1297.55,1101.47) 1305.81,1093.2 cw(c1314.08,1084.94) U2.J21@1314.08,1096.63
  SIG3 w4: J3.43@1110.01,107.51 1158.46,155.96 ccw(c697.85,616.57) 1349.24,616.57 1349.24,1088.17 ccw(c1340.19,1088.17) 1340.19,1097.22 1331.66,1097.22 ccw(c1331.66,1044.52) v1(1294.39,1081.78) ; J3.43@1114.02,119.22 ccw(c1114.02,137.78) 1127.15,124.65 ; J3.43@1118.78,106.45 cw(c1142.53,106.45) 1125.74,123.25 ; J3.43@1122.78,106.45 cw(c1156.19,106.45) 1132.57,130.08 ; J3.43@1126.78,106.45 cw(c1169.85,106.45) 1139.4,136.9
66_L5_P: J3.44 U2.K21 | length 1241.9
  Top Layer w10: v1(1294.39,1121.15) U2.K21@1314.08,1140.84 ; v1@1294.39,1125.01 ccw(c1294.39,1134.33) 1300.98,1127.74 ccw(c1307.57,1121.15) v1@1298.25,1121.15 ; U2.K21@1309.24,1140.84 cw(c1297.55,1140.84) 1305.81,1132.57 cw(c1314.08,1124.31) U2.K21@1314.08,1136
  SIG3 w4: J3.44@1114.02,53.5 1123.27,62.75 ccw(c1086.27,99.76) 1138.6,99.76 1138.6,108.71 cw(c1176.2,108.71) 1149.61,135.3 1164.19,149.88 ccw(c696.92,617.15) 1357.74,617.15 1357.74,1088.84 ccw(c1340.86,1088.84) 1340.86,1105.72 1331.66,1105.72 cw(c1331.66,1158.42) v1(1294.39,1121.15)
66_L8_N: J1.26 U2.M26 | length 1651.8
  Top Layer w10: v1@1097.54,1235.41 cw(c1097.54,1226.1) 1104.13,1232.68 cw(c1110.72,1239.26) v1@1101.4,1239.26 ; v1(1097.54,1239.26) U2.M26@1117.23,1219.58 ; U2.M26@1112.39,1219.58 ccw(c1100.69,1219.58) 1108.96,1227.85 ccw(c1117.23,1236.11) U2.M26@1117.23,1224.42
  SIG3 w4: J1.26@659.91,2449.39 981.47,2127.83 cw(c838.45,1984.8) 1040.71,1984.8 1040.71,1950.56 cw(c951.73,1950.56) 1014.65,1887.64 988.38,1861.37 ccw(c1098.62,1751.12) 942.71,1751.12 942.71,1431.93 ccw(c1040.57,1431.93) 1040.57,1334.08 1055.44,1334.08 cw(c1055.44,1276.53) 1112.98,1276.53 cw(c1060.28,1276.53) v1(1097.54,1239.26) ; J1.26@664.02,2437.78 cw(c664.02,2419.7) 676.81,2432.49 ; J1.26@668.78,2450.55 ccw(c693.01,2450.55) 675.88,2433.42 ; J1.26@672.78,2450.55 ccw(c706.67,2450.55) 682.71,2426.59 ; J1.26@676.78,2450.55 ccw(c720.32,2450.55) 689.54,2419.76
66_L8_P: J1.25 U2.M25 | length 1610
  Top Layer w10: v1@1136.91,1235.41 cw(c1136.91,1226.1) 1143.5,1232.68 cw(c1150.09,1239.26) v1@1140.77,1239.26 ; v1(1136.91,1239.26) U2.M25@1156.6,1219.58 ; U2.M25@1151.76,1219.58 ccw(c1140.07,1219.58) 1148.33,1227.85 ccw(c1156.6,1236.11) U2.M25@1156.6,1224.42
  SIG3 w4: J1.25@664.02,2503.5 673.27,2494.25 cw(c636.27,2457.24) 688.6,2457.24 688.6,2448.29 ccw(c726.2,2448.29) 699.61,2421.7 988.39,2132.93 cw(c841.55,1986.09) 1049.21,1986.09 1049.21,1951.52 cw(c949.4,1951.52) 1019.98,1880.95 992.74,1853.71 ccw(c1093,1753.45) 951.21,1753.45 951.21,1431.18 ccw(c1039.82,1431.18) 1039.82,1342.57 1055.44,1342.57 cw(c1055.44,1276.53) 1121.48,1276.53 ccw(c1174.18,1276.53) v1(1136.91,1239.26)
66_L9_N: J3.23 U2.K26 | length 1361.1
  Top Layer w6: J3.23@614.02,109.28 838.24,333.5 ccw(c479.66,692.09) 986.78,692.09 986.78,1042.94 cw(c1078.06,1042.94) 1078.06,1134.23 U2.K26@1118.62,1134.23 ; J3.23@614.02,118.22 ccw(c614.02,139.8) 629.28,124.54 ; J3.23@619.78,106.45 cw(c640.52,106.45) 625.86,121.11 ; J3.23@625.78,106.45 cw(c661,106.45) 636.1,131.36 ; 1084.75,1134.23 ccw(c1084.75,1173.32) U2.K26@1112.39,1145.68 ; 1099.23,1134.23 ccw(c1099.23,1158.83) U2.K26@1116.63,1141.43
66_L9_P: J3.24 U2.K25 | length 1331.5
  Top Layer w6: J3.24@614.02,53.5 623.27,62.75 ccw(c583.61,102.41) 639.7,102.41 639.7,106.85 cw(c666.59,106.85) 647.58,125.86 851.26,329.54 ccw(c495.12,685.68) 998.78,685.68 998.78,1042.64 cw(c1078.36,1042.64) 1078.36,1122.23 1111.67,1122.23 ccw(c1111.67,1185.77) U2.K25@1156.6,1140.84
66_L10_N: J1.28 U2.L25 | length 1753.1
  Top Layer w10: U2.L25@1156.6,1175.37 cw(c1156.6,1163.68) 1164.87,1171.94 cw(c1173.13,1180.21) U2.L25@1161.44,1180.21 ; U2.L25@1156.6,1180.21 v1(1176.28,1160.52) ; v1@1172.42,1160.52 ccw(c1163.1,1160.52) 1169.69,1167.11 ccw(c1176.28,1173.69) v1@1176.28,1164.38
  SIG3 w4: J1.28@713.55,2445.75 1000.04,2159.26 cw(c839.63,1998.84) 1066.48,1998.84 1066.48,1944.32 cw(c966.79,1944.32) 1037.29,1873.83 1007.81,1844.35 ccw(c1102.75,1749.41) 968.48,1749.41 968.48,1472.63 ccw(c1068.31,1472.63) 1068.31,1372.81 1102.02,1372.81 cw(c1102.02,1283.11) 1191.72,1283.11 1191.72,1197.79 cw(c1139.02,1197.79) v1(1176.28,1160.52) ; J1.28@714.02,2437.78 cw(c714.02,2419.7) 726.81,2432.49 ; J1.28@718.78,2450.55 ccw(c743.01,2450.55) 725.88,2433.42 ; J1.28@722.78,2450.55 ccw(c756.67,2450.55) 732.71,2426.59 ; J1.28@726.78,2450.55 ccw(c770.32,2450.55) 739.54,2419.76
66_L10_P: J1.27 U2.L24 | length 1716.1
  Top Layer w10: U2.L24@1195.97,1175.37 cw(c1195.97,1163.68) 1204.24,1171.94 cw(c1212.5,1180.21) U2.L24@1200.81,1180.21 ; U2.L24@1195.97,1180.21 v1(1215.65,1160.52) ; v1@1211.79,1160.52 ccw(c1202.47,1160.52) 1209.06,1167.11 ccw(c1215.65,1173.69) v1@1215.65,1164.38
  SIG3 w4: J1.27@714.02,2503.5 723.27,2494.25 cw(c686.27,2457.24) 738.6,2457.24 738.6,2448.29 ccw(c776.2,2448.29) 749.61,2421.7 1008.09,2163.22 cw(c846.61,2001.74) 1074.98,2001.74 1074.98,1946.59 cw(c961.31,1946.59) 1041.69,1866.21 1012.56,1837.08 ccw(c1098.45,1751.19) 976.98,1751.19 976.98,1471.48 ccw(c1067.16,1471.48) 1067.16,1381.31 1100.85,1381.31 cw(c1100.85,1281.94) 1200.22,1281.94 1200.22,1197.79 ccw(c1252.92,1197.79) v1(1215.65,1160.52)
66_L15_N: J3.25 U2.J26 | length 1293.2
  Top Layer w6: J3.25@664.02,109.28 878.94,324.19 ; J3.25@664.02,118.22 ccw(c664.02,139.8) 679.28,124.54 ; J3.25@669.78,106.45 cw(c690.52,106.45) 675.86,121.11 ; J3.25@675.78,106.45 cw(c711,106.45) 686.1,131.36 ; 879.13,324.39 ccw(c531.68,671.45) 1022.78,671.45 1022.78,1033.6 cw(c1084.03,1033.6) 1084.03,1094.86 U2.J26@1118.62,1094.86 ; 1084.75,1094.86 ccw(c1084.75,1133.95) U2.J26@1112.39,1106.31 ; 1099.23,1094.86 ccw(c1099.23,1119.46) U2.J26@1116.63,1102.06
66_L15_P: J3.26 U2.J25 | length 1263.6
  Top Layer w6: J3.26@664.02,53.5 673.27,62.75 ccw(c633.61,102.41) 689.7,102.41 689.7,107.92 cw(c714,107.92) 696.82,125.1 891.54,319.83 ccw(c545.75,665.62) 1034.78,665.62 1034.78,1032.53 cw(c1085.1,1032.53) 1085.1,1082.86 1111.67,1082.86 ccw(c1111.67,1146.4) U2.J25@1156.6,1101.47
66_L17_N: J3.28 U2.G26 | length 1151.4
  Top Layer w6: J3.28@714.02,53.5 723.27,62.75 ccw(c683.61,102.41) 739.7,102.41 739.7,106.16 cw(c768.26,106.16) 748.06,126.35 932.21,310.49 ccw(c600.31,642.39) 1069.68,642.39 1069.68,1021.91 cw(c1084.19,1021.91) 1084.19,1036.41 cw(c1084.19,989.69) U2.G26@1117.23,1022.73
66_L17_P: J3.27 U2.H26 | length 1173.8
  Top Layer w6: J3.27@714.02,109.28 918.9,314.15 ccw(c583.84,649.21) 1057.68,649.21 1057.68,1021.91 cw(c1084.19,1021.91) 1084.19,1048.41 ccw(c1084.19,1095.14) U2.H26@1117.23,1062.1 ; J3.27@714.02,118.22 ccw(c714.02,139.8) 729.28,124.54 ; J3.27@719.78,106.45 cw(c740.52,106.45) 725.86,121.11 ; J3.27@725.78,106.45 cw(c761,106.45) 736.1,131.36
67_L1_N: J3.80 U2.F15 | length 1201.5
  Top Layer w10: U2.F15@1550.3,978.52 cw(c1550.3,966.82) 1558.57,975.09 cw(c1566.83,983.36) U2.F15@1555.14,983.36 ; U2.F15@1550.3,983.36 v1(1569.99,963.67) ; v1@1566.13,963.67 ccw(c1556.81,963.67) 1563.4,970.26 ccw(c1569.99,976.84) v1@1569.99,967.53
  SIG1 w4: v1(1569.99,963.67) cw(c1607.25,926.41) 1607.25,979.11 1655.15,979.11 cw(c1655.15,970.06) 1664.21,970.06 1664.21,646.35 ccw(c2139.39,646.35) 1803.38,310.34 1978.43,135.3 cw(c1951.84,108.71) 1989.44,108.71 1989.44,99.76 ccw(c2041.77,99.76) 2004.77,62.75 J3.80@2014.02,53.5
67_L1_P: J3.79 U2.G15 | length 1259.2
  Top Layer w10: U2.G15@1550.3,1017.89 cw(c1550.3,1006.19) 1558.57,1014.46 cw(c1566.83,1022.73) U2.G15@1555.14,1022.73 ; U2.G15@1550.3,1022.73 v1(1569.99,1003.04) ; v1@1566.13,1003.04 ccw(c1556.81,1003.04) 1563.4,1009.63 ccw(c1569.99,1016.21) v1@1569.99,1006.9
  SIG1 w4: v1(1569.99,1003.04) ccw(c1607.25,1040.31) 1607.25,987.61 1655.82,987.61 cw(c1655.82,970.73) 1672.7,970.73 1672.7,648.35 ccw(c2144.23,648.35) 1810.81,314.93 J3.79@2019.52,106.22 ; 1988.5,137.24 cw(c1957.72,106.45) J3.79@2001.26,106.45 ; 1995.33,130.41 cw(c1971.37,106.45) J3.79@2005.26,106.45 ; 2001.23,124.51 ccw(c2014.02,137.3) J3.79@2014.02,119.22 ; 2002.16,123.58 cw(c1985.03,106.45) J3.79@2009.26,106.45
67_L2_N: J3.70 U2.G17 | length 1189.3
  Top Layer w10: v1(1451.87,1003.04) U2.G17@1471.56,1022.73 ; v1@1451.87,1006.9 ccw(c1451.87,1016.21) 1458.46,1009.63 ccw(c1465.05,1003.04) v1@1455.73,1003.04 ; U2.G17@1466.72,1022.73 cw(c1455.03,1022.73) 1463.29,1014.46 cw(c1471.56,1006.19) U2.G17@1471.56,1017.89
  SIG1 w4: v1(1451.87,1003.04) cw(c1489.14,965.78) 1489.14,1018.48 1537.04,1018.48 cw(c1537.04,1009.43) 1546.09,1009.43 1546.09,484.92 ccw(c1949.96,484.92) 1664.38,199.34 1728.43,135.3 cw(c1701.84,108.71) 1739.44,108.71 1739.44,99.76 ccw(c1791.77,99.76) 1754.77,62.75 J3.70@1764.02,53.5
67_L2_P: J3.69 U2.H17 | length 1230.3
  Top Layer w10: v1(1451.87,1042.41) U2.H17@1471.56,1062.1 ; v1@1451.87,1046.27 ccw(c1451.87,1055.59) 1458.46,1049 ccw(c1465.05,1042.41) v1@1455.73,1042.41 ; U2.H17@1466.72,1062.1 cw(c1455.03,1062.1) 1463.29,1053.83 cw(c1471.56,1045.57) U2.H17@1471.56,1057.26
  SIG1 w4: v1(1451.87,1042.41) ccw(c1489.14,1079.68) 1489.14,1026.98 1537.71,1026.98 cw(c1537.71,1010.1) 1554.59,1010.1 1554.59,485.08 ccw(c1950.36,485.08) 1670.51,205.23 J3.69@1757.54,118.2 ; 1738.5,137.24 cw(c1707.72,106.45) J3.69@1751.26,106.45 ; 1745.33,130.41 cw(c1721.37,106.45) J3.69@1755.26,106.45 ; 1751.23,124.51 ccw(c1764.02,137.3) J3.69@1764.02,119.22 ; 1752.16,123.58 cw(c1735.03,106.45) J3.69@1759.26,106.45
67_L3_N: J3.78 U2.D15 | length 1078.2
  Top Layer w10: U2.D15@1550.3,899.78 cw(c1550.3,888.08) 1558.57,896.35 cw(c1566.83,904.62) U2.D15@1555.14,904.62 ; U2.D15@1550.3,904.62 v1(1569.99,884.93) ; v1@1566.13,884.93 ccw(c1556.81,884.93) 1563.4,891.52 ccw(c1569.99,898.1) v1@1569.99,888.79
  SIG1 w4: v1(1569.99,884.93) cw(c1607.25,847.67) 1607.25,900.37 1615.78,900.37 cw(c1615.78,891.32) 1624.84,891.32 1624.84,642.97 ccw(c2117.54,642.97) 1769.14,294.58 1928.43,135.3 cw(c1901.84,108.71) 1939.44,108.71 1939.44,99.76 ccw(c1991.77,99.76) 1954.77,62.75 J3.78@1964.02,53.5
67_L3_P: J3.77 U2.E15 | length 1115.3
  Top Layer w10: U2.E15@1550.3,939.15 cw(c1550.3,927.45) 1558.57,935.72 cw(c1566.83,943.99) U2.E15@1555.14,943.99 ; U2.E15@1550.3,943.99 v1(1569.99,924.3) ; v1@1566.13,924.3 ccw(c1556.81,924.3) 1563.4,930.89 ccw(c1569.99,937.47) v1@1569.99,928.16
  SIG1 w4: v1(1569.99,924.3) ccw(c1607.25,961.57) 1607.25,908.87 1616.45,908.87 cw(c1616.45,891.99) 1633.33,891.99 1633.33,648.18 ccw(c2130.11,648.18) 1778.84,296.91 1955.13,120.61 ; 1938.5,137.24 cw(c1907.72,106.45) J3.77@1951.26,106.45 ; 1945.33,130.41 cw(c1921.37,106.45) J3.77@1955.26,106.45 ; 1951.23,124.51 ccw(c1964.02,137.3) J3.77@1964.02,119.22 ; 1952.16,123.58 cw(c1935.03,106.45) J3.77@1959.26,106.45
67_L4_N: J3.57 U2.E17 | length 989
  Top Layer w10: U2.E17@1471.56,939.15 cw(c1471.56,927.45) 1479.83,935.72 cw(c1488.09,943.99) U2.E17@1476.4,943.99 ; U2.E17@1471.56,943.99 v1(1491.24,924.3) ; v1@1487.39,924.3 ccw(c1478.07,924.3) 1484.66,930.89 ccw(c1491.24,937.47) v1@1491.24,928.16
  SIG2 w4: J3.57@1463.05,110.75 1495.31,143.01 ccw(c1467.85,170.47) 1506.68,170.47 1506.68,887.04 ccw(c1453.98,887.04) v1(1491.24,924.3) ; J3.57@1464.02,119.22 ccw(c1464.02,137.3) 1476.81,124.51 ; J3.57@1468.78,106.45 cw(c1493.01,106.45) 1475.88,123.58 ; J3.57@1472.78,106.45 cw(c1506.67,106.45) 1482.71,130.41 ; J3.57@1476.78,106.45 cw(c1520.32,106.45) 1489.54,137.24
67_L4_P: J3.58 U2.E16 | length 950.8
  Top Layer w10: U2.E16@1510.93,939.15 cw(c1510.93,927.45) 1519.2,935.72 cw(c1527.46,943.99) U2.E16@1515.77,943.99 ; U2.E16@1510.93,943.99 v1(1530.62,924.3) ; v1@1526.76,924.3 ccw(c1517.44,924.3) 1524.03,930.89 ccw(c1530.62,937.47) v1@1530.62,928.16
  SIG2 w4: J3.58@1464.02,53.5 1473.27,62.75 ccw(c1436.27,99.76) 1488.6,99.76 1488.6,108.71 cw(c1526.2,108.71) 1499.61,135.3 ccw(c1462.03,172.88) 1515.18,172.88 1515.18,887.04 cw(c1567.88,887.04) v1(1530.62,924.3)
67_L5_N: J3.72 U2.G16 | length 1168.8
  Top Layer w10: v1(1491.24,1003.04) U2.G16@1510.93,1022.73 ; v1@1491.24,1006.9 ccw(c1491.24,1016.21) 1497.83,1009.63 ccw(c1504.42,1003.04) v1@1495.1,1003.04 ; U2.G16@1506.09,1022.73 cw(c1494.4,1022.73) 1502.66,1014.46 cw(c1510.93,1006.19) U2.G16@1510.93,1017.89
  SIG2 w4: v1(1491.24,1003.04) cw(c1528.51,965.78) 1528.51,1018.48 1537,1018.48 cw(c1537,1009.43) 1546.05,1009.43 1546.05,547.66 ccw(c1980.56,547.66) 1672.96,240.76 ; 1673.32,240.41 1778.43,135.3 cw(c1751.84,108.71) 1789.44,108.71 1789.44,99.76 ccw(c1841.77,99.76) 1804.77,62.75 J3.72@1814.02,53.5
67_L5_P: J3.71 U2.H16 | length 1222.6
  Top Layer w10: v1(1491.24,1042.41) U2.H16@1510.93,1062.1 ; v1@1491.24,1046.27 ccw(c1491.24,1055.59) 1497.83,1049 ccw(c1504.42,1042.41) v1@1495.1,1042.41 ; U2.H16@1506.09,1062.1 cw(c1494.4,1062.1) 1502.66,1053.83 cw(c1510.93,1045.57) U2.H16@1510.93,1057.26
  SIG2 w4: v1(1491.24,1042.41) ccw(c1528.51,1079.68) 1528.51,1026.98 1537.67,1026.98 cw(c1537.67,1010.1) 1554.55,1010.1 1554.55,545.42 ccw(c1975.15,545.42) 1677.74,248.01 J3.71@1816.07,109.67 ; 1788.5,137.24 cw(c1757.72,106.45) J3.71@1801.26,106.45 ; 1795.33,130.41 cw(c1771.37,106.45) J3.71@1805.26,106.45 ; 1801.23,124.51 ccw(c1814.02,137.3) J3.71@1814.02,119.22 ; 1802.16,123.58 cw(c1785.03,106.45) J3.71@1809.26,106.45
67_L6_N: J3.68 U2.C16 | length 960.8
  Top Layer w10: v1@1491.24,881.08 cw(c1491.24,871.76) 1497.83,878.35 cw(c1504.42,884.93) v1@1495.1,884.93 ; v1(1491.24,884.93) U2.C16@1510.93,865.25 ; U2.C16@1506.09,865.25 ccw(c1494.4,865.25) 1502.66,873.51 ccw(c1510.93,881.78) U2.C16@1510.93,870.09
  SIG1 w4: v1(1491.24,884.93) cw(c1453.98,847.67) 1506.68,847.67 1506.68,476.49 ccw(c1915.76,476.49) 1626.5,187.23 1678.43,135.3 cw(c1651.84,108.71) 1689.44,108.71 1689.44,99.76 ccw(c1741.77,99.76) 1704.77,62.75 J3.68@1714.02,53.5
67_L6_P: J3.67 U2.D16 | length 1002.9
  Top Layer w10: U2.D16@1510.93,899.78 cw(c1510.93,888.08) 1519.2,896.35 cw(c1527.46,904.62) U2.D16@1515.77,904.62 ; U2.D16@1510.93,904.62 v1(1530.62,884.93) ; v1@1526.76,884.93 ccw(c1517.44,884.93) 1524.03,891.52 ccw(c1530.62,898.1) v1@1530.62,888.79
  SIG1 w4: v1(1530.62,884.93) ccw(c1567.88,847.67) 1515.18,847.67 1515.18,478.98 ccw(c1921.77,478.98) 1634.27,191.48 J3.67@1718.13,107.61 ; 1688.5,137.24 cw(c1657.72,106.45) J3.67@1701.26,106.45 ; 1695.33,130.41 cw(c1671.37,106.45) J3.67@1705.26,106.45 ; 1701.23,124.51 ccw(c1714.02,137.3) J3.67@1714.02,119.22 ; 1702.16,123.58 cw(c1685.03,106.45) J3.67@1709.26,106.45
67_L7_N: J3.76 U2.H19 | length 1348.1
  Top Layer w10: U2.H19@1392.82,1057.26 cw(c1392.82,1045.57) 1401.09,1053.83 cw(c1409.35,1062.1) U2.H19@1397.66,1062.1 ; U2.H19@1392.82,1062.1 v1(1412.5,1042.41) ; v1@1408.65,1042.41 ccw(c1399.33,1042.41) 1405.92,1049 ccw(c1412.5,1055.59) v1@1412.5,1046.27
  SIG2 w4: v1(1412.5,1042.41) cw(c1449.77,1005.15) 1449.77,1057.85 1576.41,1057.85 cw(c1576.41,1048.8) 1585.46,1048.8 1585.46,644.53 ccw(c2107.59,644.53) 1738.39,275.34 1878.43,135.3 cw(c1851.84,108.71) 1889.44,108.71 1889.44,99.76 ccw(c1941.77,99.76) 1904.77,62.75 J3.76@1914.02,53.5
67_L7_P: J3.75 U2.H18 | length 1401.4
  Top Layer w10: v1@1412.5,1077.93 cw(c1412.5,1068.61) 1419.09,1075.2 cw(c1425.68,1081.78) v1@1416.36,1081.78 ; v1(1412.5,1081.78) U2.H18@1432.19,1062.1 ; U2.H18@1427.35,1062.1 ccw(c1415.66,1062.1) 1423.92,1070.37 ccw(c1432.19,1078.63) U2.H18@1432.19,1066.94
  SIG2 w4: v1(1412.5,1081.78) ccw(c1449.77,1119.05) 1449.77,1066.35 1577.08,1066.35 cw(c1577.08,1049.47) 1593.96,1049.47 1593.96,642.65 ccw(c2103.03,642.65) 1743.07,282.68 J3.75@1916.07,109.67 ; 1888.5,137.24 cw(c1857.72,106.45) J3.75@1901.26,106.45 ; 1895.33,130.41 cw(c1871.37,106.45) J3.75@1905.26,106.45 ; 1901.23,124.51 ccw(c1914.02,137.3) J3.75@1914.02,119.22 ; 1902.16,123.58 cw(c1885.03,106.45) J3.75@1909.26,106.45
67_L9_N: J3.41 U2.G21 | length 1129.1
  Top Layer w10: v1(1294.39,1003.04) U2.G21@1314.08,1022.73 ; v1@1294.39,1006.9 ccw(c1294.39,1016.21) 1300.98,1009.63 ccw(c1307.57,1003.04) v1@1298.25,1003.04 ; U2.G21@1309.24,1022.73 cw(c1297.55,1022.73) 1305.81,1014.46 cw(c1314.08,1006.19) U2.G21@1314.08,1017.89
  SIG2 w4: J3.41@1063.05,110.75 1143.89,191.6 ccw(c743.29,592.2) 1309.83,592.2 1309.83,965.78 ccw(c1257.13,965.78) v1(1294.39,1003.04) ; J3.41@1064.02,119.22 ccw(c1064.02,137.3) 1076.81,124.51 ; J3.41@1068.78,106.45 cw(c1093.01,106.45) 1075.88,123.58 ; J3.41@1072.78,106.45 cw(c1106.67,106.45) 1082.71,130.41 ; J3.41@1076.78,106.45 cw(c1120.32,106.45) 1089.54,137.24